# Altium PCB PCB_2.PcbDoc
Units mm, origin at the board's own origin, x right, y up, seen from the top; angles counter-clockwise.
Board outline 70 x 50 mm, 4 copper layers (Top Layer, Layer 1, Layer 2, Bottom Layer), stack 1.572 mm thick; 99 components, 81 nets, 378 pads, 29 vias.
Unrouted connection lines stored in the file: 254.
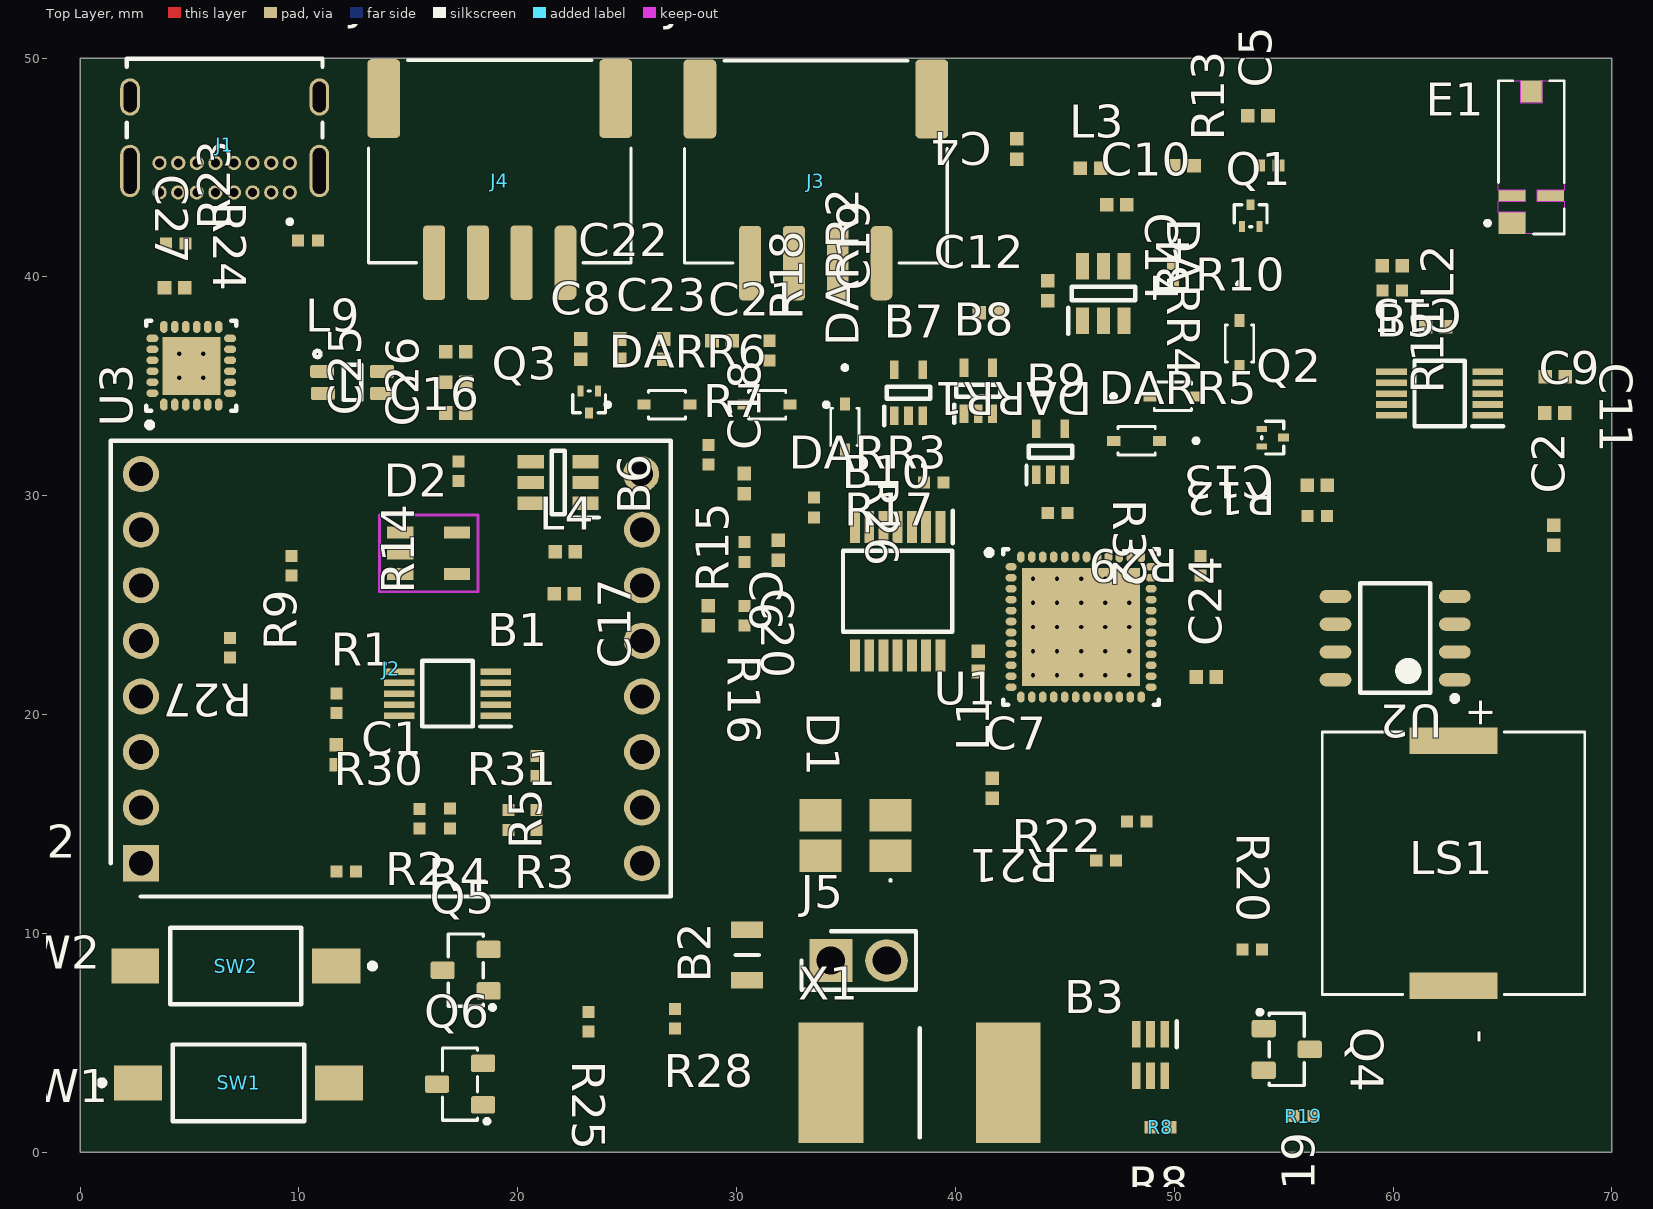
[diagram p0: Top Layer view]
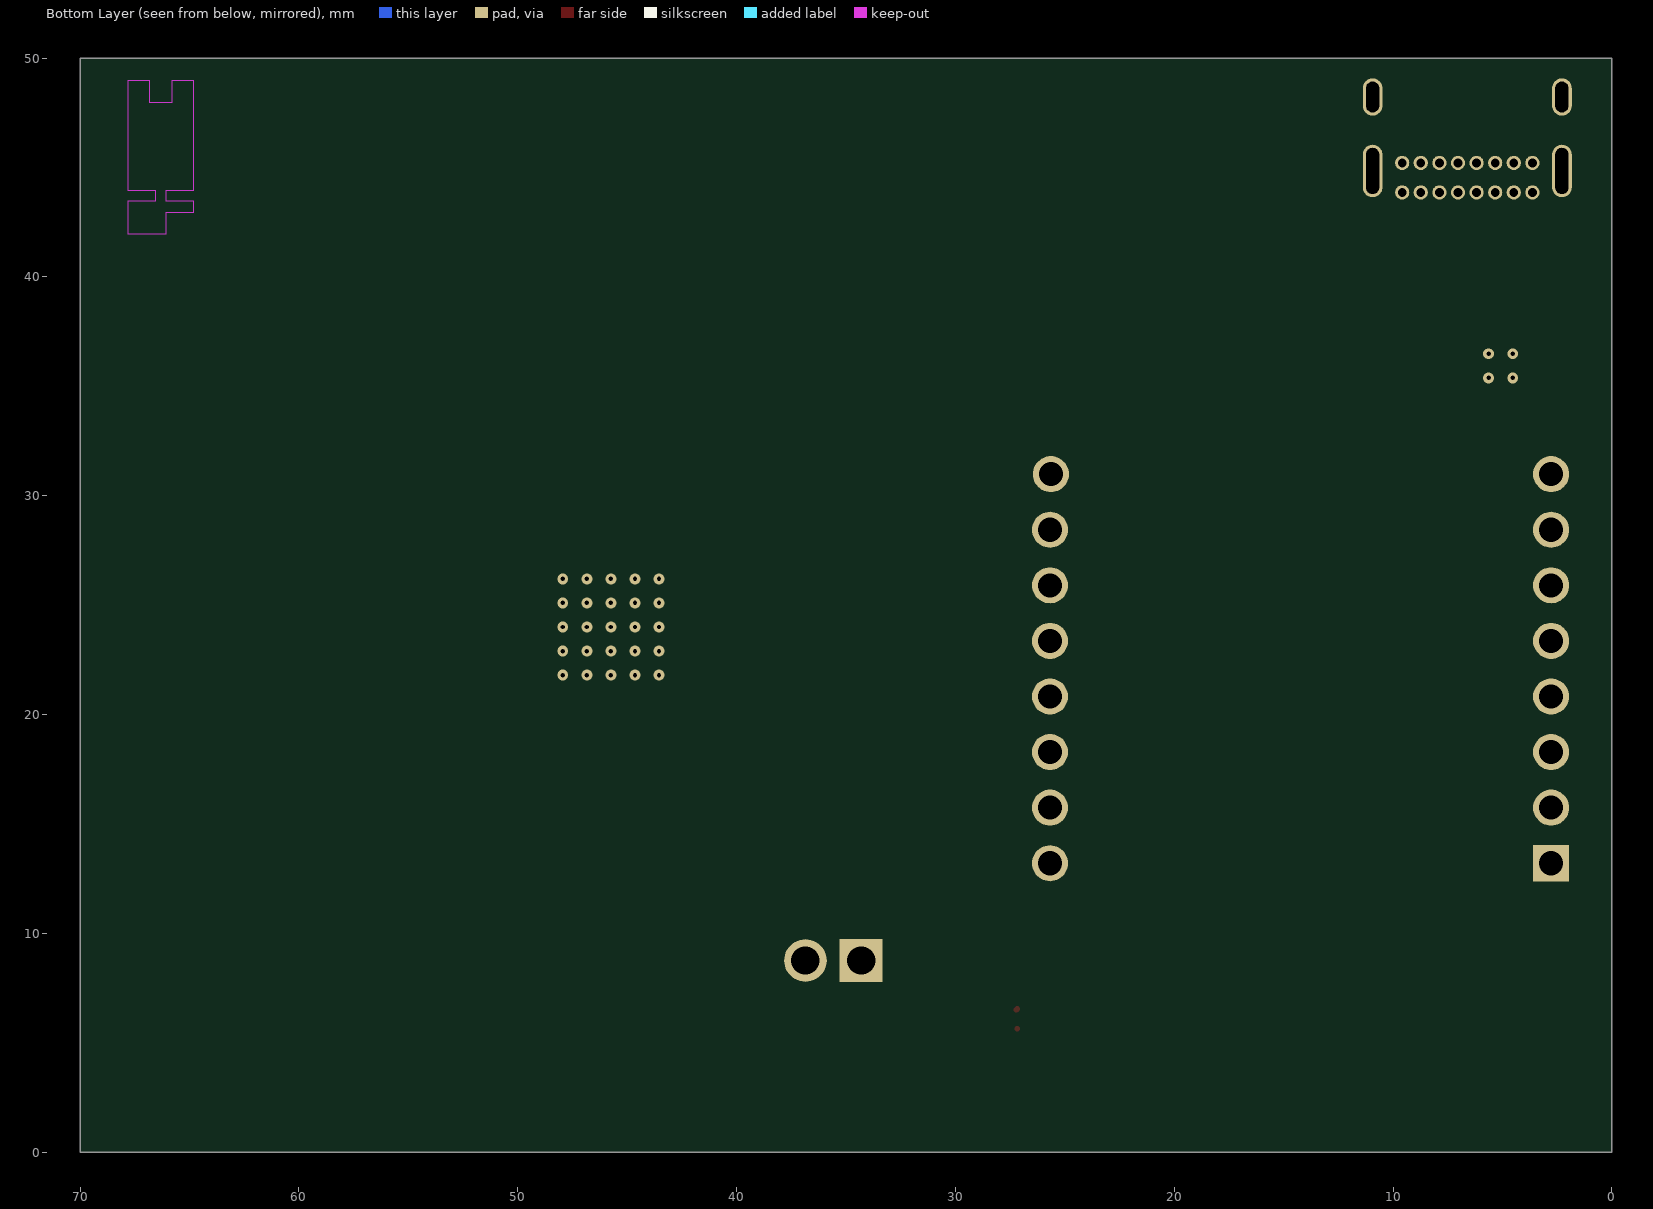
[diagram p1: Bottom Layer view, seen from below]

## Layer stack, top to bottom
Top Solder: solder mask 0.01, Solder Resist, Dk 3.5
Top Layer: signal copper 0.035
Dielectric 1: prepreg 0.1803, PP-021, Dk 4.7
Dielectric 2: prepreg 0.1803, PP-021, Dk 4.7
Layer 1: signal copper 0.035
Dielectric 3: core 0.711, Core-042, Dk 4.8
Layer 2: signal copper 0.035
Dielectric 4: prepreg 0.1803, PP-021, Dk 4.7
Dielectric 5: prepreg 0.1803, PP-021, Dk 4.7
Bottom Layer: signal copper 0.035
Bottom Solder: solder mask 0.01, Solder Resist, Dk 3.5

## Board outline
0,0 69.999,0 69.999,50 0,50

## Design rules (kind name [scope] priority, off if disabled: settings)
Clearance [All] p1: gap=0.254 ignorepadtopadclearanceinfootprint=FALSE except(0: Arc-Hole Track-Hole SMDPad-Hole THPad-Hole Via-Hole Fill-Hole Poly-Hole Region-Hole Text-Hole)
DiffPairsRouting "Schematic Differential Pairs Routing_3" [InNet('USB_D_P')] p1: maxlimit=0.127 minlimit=0.127 mostfreqgap=0.127 toplayer_minwidth=0.303 toplayer_maxwidth=0.303 toplayer_prefwidth=0.303 midlayer1_minwidth=0.109 midlayer1_maxwidth=0.109 midlayer1_prefwidth=0.109 midlayer2_minwidth=0.109 midlayer2_maxwidth=0.109 midlayer2_prefwidth=0.109 bottomlayer_minwidth=0.303 bottomlayer_maxwidth=0.303 bottomlayer_prefwidth=0.303 impedanceprofiledriven=TRUE impedanceprofileid={AF31A497-00BC-4CFA-BE3F-A0478A3B4F41} impedanceprofilevalue=90.000000 maxuncoupledlength=12.7
DiffPairsRouting "Schematic Differential Pairs Routing_2" [InNet('FILTRE_D_N')] p2: maxlimit=0.127 minlimit=0.127 mostfreqgap=0.127 toplayer_minwidth=0.303 toplayer_maxwidth=0.303 toplayer_prefwidth=0.303 midlayer1_minwidth=0.109 midlayer1_maxwidth=0.109 midlayer1_prefwidth=0.109 midlayer2_minwidth=0.109 midlayer2_maxwidth=0.109 midlayer2_prefwidth=0.109 bottomlayer_minwidth=0.303 bottomlayer_maxwidth=0.303 bottomlayer_prefwidth=0.303 impedanceprofiledriven=TRUE impedanceprofileid={AF31A497-00BC-4CFA-BE3F-A0478A3B4F41} impedanceprofilevalue=90.000000 maxuncoupledlength=12.7
DiffPairsRouting "Schematic Differential Pairs Routing_1" [InNet('USB_D_N')] p3: maxlimit=0.127 minlimit=0.127 mostfreqgap=0.127 toplayer_minwidth=0.303 toplayer_maxwidth=0.303 toplayer_prefwidth=0.303 midlayer1_minwidth=0.109 midlayer1_maxwidth=0.109 midlayer1_prefwidth=0.109 midlayer2_minwidth=0.109 midlayer2_maxwidth=0.109 midlayer2_prefwidth=0.109 bottomlayer_minwidth=0.303 bottomlayer_maxwidth=0.303 bottomlayer_prefwidth=0.303 impedanceprofiledriven=TRUE impedanceprofileid={AF31A497-00BC-4CFA-BE3F-A0478A3B4F41} impedanceprofilevalue=90.000000 maxuncoupledlength=12.7
DiffPairsRouting "Schematic Differential Pairs Routing" [InNet('FILTRE_D_P')] p4: maxlimit=0.127 minlimit=0.127 mostfreqgap=0.127 toplayer_minwidth=0.303 toplayer_maxwidth=0.303 toplayer_prefwidth=0.303 midlayer1_minwidth=0.109 midlayer1_maxwidth=0.109 midlayer1_prefwidth=0.109 midlayer2_minwidth=0.109 midlayer2_maxwidth=0.109 midlayer2_prefwidth=0.109 bottomlayer_minwidth=0.303 bottomlayer_maxwidth=0.303 bottomlayer_prefwidth=0.303 impedanceprofiledriven=TRUE impedanceprofileid={AF31A497-00BC-4CFA-BE3F-A0478A3B4F41} impedanceprofilevalue=90.000000 maxuncoupledlength=12.7
PolygonConnect [All] p1: connectstyle=Relief reliefconductorwidth=0.254 reliefentries=4 polygonreliefangle="90 Angle" airgapwidth=0.254
RoutingVias [All] p1: holewidth=0.711 width=1.27 viastyle="Through Hole" minholewidth=0.711 minwidth=1.27 maxholewidth=0.711 maxwidth=1.27
SolderMaskExpansion [All] p1: expansion=0.102 istentingtop=FALSE
SupplyNets "Schematic Supply Nets_11" [InNet('3V3')] p1: voltage=0.000
SupplyNets "Schematic Supply Nets_10" [InNet('HT')] p2: voltage=0.000
SupplyNets "Schematic Supply Nets_9" [InNet('NOT_3V3_BT')] p3: voltage=0.000
SupplyNets "Schematic Supply Nets_8" [InNet('USB')] p4: voltage=0.000
SupplyNets "Schematic Supply Nets_7" [InNet('VDDA')] p5: voltage=0.000
SupplyNets "Schematic Supply Nets_6" [InNet('NOT_3V3_USB')] p6: voltage=0.000
SupplyNets "Schematic Supply Nets_5" [InNet('3V3_Logique')] p7: voltage=0.000
SupplyNets "Schematic Supply Nets_4" [InNet('3V3_BT')] p8: voltage=0.000
SupplyNets "Schematic Supply Nets_3" [InNet('BT')] p9: voltage=0.000
SupplyNets "Schematic Supply Nets_2" [InNet('3V3_HT')] p10: voltage=0.000
SupplyNets "Schematic Supply Nets_1" [InNet('GND')] p11: voltage=0.000
SupplyNets "Schematic Supply Nets" [InNet('3V3_USB')] p12: voltage=0.000
Width Antenne [InNet('NetC5_2')] p1: maxlimit=0.624 minlimit=0.254 preferedwidth=0.624 impedanceprofiledriven=TRUE impedanceprofileid={634E063D-215B-4283-ACFF-58841ED45AF4} impedanceprofilevalue=50.000000 minimp=50.000000 maximp=50.000000 favimp=50.000000 checkconnectedcopper=TRUE // Schematic Width Constraint
Width [All] p2: maxlimit=0.624 minlimit=0.352 preferedwidth=0.624 toplayer_minwidth=0.624 midlayer1_maxwidth=0.352 midlayer1_prefwidth=0.352 midlayer2_maxwidth=0.352 midlayer2_prefwidth=0.352 bottomlayer_minwidth=0.624 minimp=50.000000 maximp=50.000000 favimp=50.000000
29 further rules are at their usual default settings.

## Classes and differential pairs
component class USB: C25 C26 C27 D2 J1 L1 L9 Q5 Q6 R23 R24 R25 R26 R27 R28 U3
component class Logique_Prio_Alim: B7 B8 B9 B10 DARR4 DARR5 DARR6 Q1 Q2 Q3
component class IHM: C21 D1 LS1 Q4 R18 R19 R20 R21 R22 SW1 SW2
component class I2C: B1 C1 C2 J2 J3 J4 J5 R1 R2 R3 R4 R5 R29 R30 R31 X1
component class ESP32_SRAM: C22 C23 C24 R32 U1 U2
component class Converti_Alim: B4 B5 B6 C9 C10 C11 C12 C13 C14 C15 C16 C17 C18 C19 C20 DARR1 DARR2 DARR3 L2 L3 L4 R10 R11 R12 R13 R14 R15 R16 R17
component class Capteurs_et_Antenne: B2 B3 C4 C5 C6 C7 C8 E1 R7 R8 R9
differential pair USB_D: +USB_D_P -USB_D_N
differential pair FILTRE_D: +FILTRE_D_P -FILTRE_D_N

## Components (designator, comment, footprint, x,y, rotation, side; value= is the part's Value field where it differs from the comment)
B1 "INA237AIDGST" SOP50P490X110-10N 16.787,20.955 r180 top
B2 "NB12K00103JBB" RESC2212X50N 30.48,9.017 r90 top
B3 "TMP126DCKR" SOT65P210X110-6N 48.918,4.445 r270 top
B4 "LMR50410Y3FQDBVRQ1" SOT95P280X145-6N 46.759,39.243 r90 top
B5 "TPS62056DGSG4" SOP50P490X110-10N 62.126,34.671 r180 top
B6 "LMR50410Y3FQDBVRQ1" SOT95P280X145-6N 21.847,30.607 r180 top
B7 "MC74VHC1GT08DFT2G" SOT65P210X110-5N 37.854,34.705 r90 top
B8 "MC74VHC1GT08DFT2G" SOT65P210X110-5N 41.044,34.798 r90 top
B9 "MC74VHC1GT08DFT2G" SOT65P210X110-5N 44.346,32.004 r90 top
B10 "74VHC05FT" SOP65P640X120-14N 37.361,25.637 r270 top
C1 "100nF" CAPC1005X06N 11.707,18.161 r270 top
C2 "100nF" CAPC1005X06N 67.333,28.194 r90 top
C4 "0.6pF" CAPC1005X06N 42.799,45.847 r270 top
C5 "0.9pF" CAPC1005X06N 53.823,47.371 r0 top
C6 "10nF" CAPC1005X06N 28.702,24.511 r270 top
C7 "1pF" CAPC1005X06N 41.679,16.637 r90 top
C8 "0.1µF" CAPC1005X06N 22.883,36.703 r90 top
C9 "10µF" CAPC1005X06N 67.381,33.782 r0 top
C10 "2.2µF" CAPC1005X06N 47.371,43.307 r180 top
C11 "22µF" CAPC1005X06N 67.412,35.433 r0 top
C12 "0.1µF" CAPC1005X06N 44.219,39.37 r90 top
C13 "0.01F" CAPC1005X06N 56.538,30.48 r180 top
C14 "0.01F" CAPC1005X06N 50.442,45.085 r0 top
C15 "10µF" CAPC1005X06N 59.967,40.513 r0 top
C16 "2.2µF" CAPC1005X06N 17.168,36.576 r180 top
C17 "0.1µF" CAPC1005X06N 22.121,25.527 r180 top
C18 "0.01F" CAPC1005X06N 30.353,30.559 r90 top
C19 "10µF" CAPC1005X06N 41.552,38.354 r0 top
C20 "10µF" CAPC1005X06N 31.9,27.511 r270 top
C21 "1µF" CAPC1005X06N 29.337,37.084 r180 top
C22 "10µF" CAPC1005X06N 24.661,36.703 r90 top
C23 "100nF" CAPC1005X06N 26.67,36.703 r90 top
C24 "100nF" CAPC1005X06N 51.458,21.717 r0 top
C25 "100nF" CAPC1005X06N 17.168,35.179 r180 top
C26 "22µF" CAPC1005X06N 17.168,33.782 r180 top
C27 "4.7µF" CAPC1005X06N 4.318,39.497 r180 top
D1 "598-8610-207F" 5988610207F 35.433,14.478 r180 top
D2 "824011" 824011 15.928,27.366 r270 top
DARR1 "SD103AWS-7-F" SD103AWS-7-F 49.934,34.544 r0 top
DARR2 "SD103AWS-7-F" SD103AWS-7-F 34.948,33.147 r270 top
DARR3 "SD103AWS-7-F" SD103AWS-7-F 31.392,34.163 r180 top
DARR4 "SD103AWS-7-F" SD103AWS-7-F 52.982,36.957 r270 top
DARR5 "SD103AWS-7-F" SD103AWS-7-F 48.283,32.512 r180 top
DARR6 "SD103AWS-7-F" SD103AWS-7-F 26.82,34.163 r0 top
E1 "NN03-320" XCVR_NN03-320 66.317,45.466 r270 top
J1 "Use" USB4085-GF-A 6.609,48.222 r180 top
J2 "825433-8" Connect-Mikrobus 2.777,13.208 r90 top locked
J3 "114020164" 114020164 33.621,44.433 r180 top
J4 "114020164" 114020164 19.177,44.45 r180 top
J5 "61300211121" 61300211121 34.313,8.763 r0 top
L1 "12nH" LQPC1005X06N 38.25,25.225 r90 top
L2 "10µH" LQPC1005X06N 64.745,40.513 r0 top
L3 "3.3µH" LQPC1005X06N 48.966,47.752 r0 top
L4 "3.3µH" LQPC1005X06N 24.963,30.226 r0 top
L9 "Filtre en mode commun" 744232090 12.446,35.179 r0 top
LS1 "PKLCS1212E40A1-R1" SPKR_PKLCS1212E40A1-R1 62.761,13.208 r270 top
Q1 "SI3139K-TP" SI3139K-TP 53.49,42.799 r0 top
Q2 "SI3139K-TP" SI3139K-TP 54.498,32.658 r270 top
Q3 "SI3139K-TP" SI3139K-TP 23.264,34.29 r180 top
Q4 "SS8050-G" SS8050-G 55.141,4.699 r270 top
Q5 "SS8050-G" SS8050-G 17.619,8.321 r90 top
Q6 "SS8050-G" SS8050-G 17.365,3.114 r90 top
R1 "10Ω" RESC1005X06N 11.707,20.516 r90 top
R2 "10Ω" RESC1005X06N 12.157,12.827 r0 top
R3 "4.7kΩ" RESC1005X06N 20.851,15.182 r270 top
R4 "4.7kΩ" RESC1005X06N 16.914,15.251 r270 top
R5 "10kΩ" RESC1005X06N 20.851,17.653 r270 top
R7 "10kΩ" RESC1005X06N 28.725,31.877 r270 top
R8 "10kΩ" RESC1005X06N 49.368,1.143 r0 top
R9 "10kΩ" RESC1005X06N 9.652,26.797 r90 top
R10 "51kΩ" RESC1005X06N 49.934,40.132 r270 top
R11 "22.1kΩ" RESC1005X06N 59.967,39.37 r180 top
R12 "1kΩ" RESC1005X06N 56.538,29.083 r180 top
R13 "1kΩ" RESC1005X06N 54.321,45.085 r180 top
R14 "100k" RESC1005X06N 17.295,31.115 r90 top
R15 "51kΩ" RESC1005X06N 30.353,27.432 r270 top
R16 "22.1kΩ" RESC1005X06N 30.353,24.511 r90 top
R17 "1kΩ" RESC1005X06N 33.528,29.464 r90 top
R18 "10kΩ" RESC1005X06N 31.496,36.634 r270 top
R19 "1kΩ" RESC1005X06N 55.903,1.651 r180 top
R20 "1kΩ" RESC1005X06N 53.559,9.271 r0 top
R21 "330Ω" RESC1005X06N 46.886,13.335 r180 top
R22 "330Ω" RESC1005X06N 48.283,15.113 r180 top
R23 "5.1kΩ" RESC1005X06N 10.414,41.656 r180 top
R24 "5.1kΩ" RESC1005X06N 4.376,41.529 r0 top
R25 "12kΩ" RESC1005X06N 23.241,5.969 r270 top
R26 "470Ω" RESC1005X06N 39.012,30.607 r180 top
R27 "470Ω" RESC1005X06N 6.858,23.056 r90 top
R28 "12kΩ" RESC1005X06N 27.178,6.096 r90 top
R29 "100kΩ" RESC1005X06N 51.204,26.797 r90 top
R30 "2kΩ" RESC1005X06N 15.517,15.24 r270 top
R31 "2kΩ" RESC1005X06N 19.581,15.182 r270 top
R32 "0Ω" RESC1005X06N 44.669,29.21 r0 top
SW1 "FSMSM" TECO-FSMSM-2_V 7.239,3.175 r0 top
SW2 "FSMSM" TECO-FSMSM-2_V 7.112,8.509 r180 top
U1 "ESP32-PICO-D4" PQFN50P700X700X104_HS-49N 45.743,24.003 r0 top
U2 "IS66WVS1M8BLL-104NLI" SOIC127P600X175-8N 60.094,23.495 r180 top
U3 "CP2104-F03-GM" PQFN50P400X400X80_HS-25N 5.08,35.941 r90 top
X1 "PSR400ITQFF0L50" RESC10052X200N 38.363,3.175 r0 top

## Footprints (in the part's own frame and the unit in brackets; to place one, negate y for a bottom-side part, rotate by r counter-clockwise, add the part's x,y. Pads: shape width x height; smd on the part's side, far side on the other; paste and mask are expansions set on the pad)
824011 [mil] "Suppresseurs ESD / diodes TVS WE-TVS High Speed 5uA 5VDC 2+1"
  rect 21.65x47.24 smd: 1(-37.4,-51.18) 2(0,-51.18) 3(37.4,-51.18) 4(37.4,51.18) 5(-37.5,51)
  Top Layer keep-out lines w5: 68.9,-88.58 -68.9,-88.58 -68.9,88.58 68.9,88.58 68.9,-88.58
  body extent -57,-55 57,55, height 57
114020164 [mm]
  rrect50% 1x3.4 smd: 1(-3,3.8)
  rrect30% 1x3.4 smd: 2(-1,3.8) 3(1,3.8) 4(3,3.8)
  rrect26% 1.5x3.6 smd: MP1(-5.3,-3.7) MP2(5.3,-3.7)
  silkscreen extent -6,-5.45 6,3.8, body extent -6.1,-5.59 5.9,4.59, height 5.2
744232090 [mm]
  rrect50% 1.1x0.6 smd: 1(-1.4,0.5)
  rrect33% 1.1x0.6 smd: 2(1.35,0.5) 3(1.35,-0.5) 4(-1.35,-0.5)
  silkscreen extent -1.74,-0.8 0.4,1.44, body extent -1.6,-0.8 1.6,0.8, height 1.8
5988610207F [mm]
  rect 1.9x1.5 smd: 1(-1.6,0.925) 2(1.6,0.925) 3(-1.6,-0.925) 4(1.6,-0.925)
  silkscreen extent -1.65,2 -1.55,2.1, body extent -1.6,-1.35 1.6,1.35, height 0.9
61300211121 [mm] "Embases et logements de câbles WR-PHD 2.54mm 2Pin T HT Header"
  rect 1.95x1.95 / inner round 1.95 / far side rect 1.95x1.95 hole 1.3: 1(0,0)
  round 1.95 hole 1.3: 2(2.54,0)
  silkscreen extent -1.35,-1.35 3.89,1.35
CAPC1005X06N [mm] "Chip Capacitor, 2-Leads, Body 1,00x0,50mm, IPC Medium Density"
  rect 0.62x0.62 smd: 1(-0.46,0) 2(0.46,0)
  body extent -0.53,-0.28 0.53,0.28, height 0.55
Connect-Mikrobus [mm]
  rect 1.65x1.65 / inner round 1.65 / far side rect 1.65x1.65 hole 1.1: 1(0,0)
  round 1.65 hole 1.1: 2(2.54,0) 3(5.08,0) 4(7.62,0) 5(10.16,0) 6(12.7,0) 7(15.24,0) 8(17.78,0) 9(17.78,-22.86) 10(15.24,-22.9) 11(12.7,-22.9) 12(10.16,-22.9) 13(7.62,-22.9) 14(5.08,-22.9) 15(2.54,-22.9) 16(0,-22.9)
  silkscreen extent -1.52,-24.22 19.3,1.37, body extent -1.37,-24.18 19.14,1.28, height 6.7
LQPC1005X06N [mm]
  rect 0.62x0.62 smd: 1(-3.254,-2.794) 2(-2.334,-2.794)
  body extent -3.32,-3.07 -2.27,-2.52, height 0.55
PQFN50P400X400X80_HS-25N [mm] "PQFN, 24-Leads, Body 4,00x4,00mm, Pitch 0,50mm, Thermal Pad 2,65x2,65mm, IPC Medium Density"
  oval 0.55x0.35 smd: 1(-1.775,1.25) 2(-1.775,0.75) 3(-1.775,0.25) 4(-1.775,-0.25) 5(-1.775,-0.75) 6(-1.775,-1.25) 13(1.775,-1.25) 14(1.775,-0.75) 15(1.775,-0.25) 16(1.775,0.25) 17(1.775,0.75) 18(1.775,1.25)
  oval 0.35x0.55 smd: 7(-1.25,-1.775) 8(-0.75,-1.775) 9(-0.25,-1.775) 10(0.25,-1.775) 11(0.75,-1.775) 12(1.25,-1.775) 19(1.25,1.775) 20(0.75,1.775) 21(0.25,1.775) 22(-0.25,1.775) 23(-0.75,1.775) 24(-1.25,1.775)
  rect 2.65x2.65 smd: 25(0,0)
  silkscreen extent -2.82,-2.05 2.05,2.05, body extent -2.05,-2.05 2.05,2.05, height 0.8
PQFN50P700X700X104_HS-49N [mm] "PQFN, 48-Leads, Body 7,00x7,00mm, Pitch 0,50mm, Thermal Pad 5,40x5,40mm, IPC Medium Density"
  oval 0.5x0.35 smd: 1(-3.2,2.75) 2(-3.2,2.25) 3(-3.2,1.75) 4(-3.2,1.25) 5(-3.2,0.75) 6(-3.2,0.25) 7(-3.2,-0.25) 8(-3.2,-0.75) 9(-3.2,-1.25) 10(-3.2,-1.75) 11(-3.2,-2.25) 12(-3.2,-2.75) 25(3.2,-2.75) 26(3.2,-2.25) 27(3.2,-1.75) 28(3.2,-1.25) 29(3.2,-0.75) 30(3.2,-0.25) 31(3.2,0.25) 32(3.2,0.75) 33(3.2,1.25) 34(3.2,1.75) 35(3.2,2.25) 36(3.2,2.75)
  oval 0.35x0.5 smd: 13(-2.75,-3.2) 14(-2.25,-3.2) 15(-1.75,-3.2) 16(-1.25,-3.2) 17(-0.75,-3.2) 18(-0.25,-3.2) 19(0.25,-3.2) 20(0.75,-3.2) 21(1.25,-3.2) 22(1.75,-3.2) 23(2.25,-3.2) 24(2.75,-3.2) 37(2.75,3.2) 38(2.25,3.2) 39(1.75,3.2) 40(1.25,3.2) 41(0.75,3.2) 42(0.25,3.2) 43(-0.25,3.2) 44(-0.75,3.2) 45(-1.25,3.2) 46(-1.75,3.2) 47(-2.25,3.2) 48(-2.75,3.2)
  rect 5.4x5.4 smd: 49(0,0)
  silkscreen extent -4.32,-3.55 3.55,3.55, body extent -3.55,-3.55 3.55,3.55, height 1.04
RESC1005X06N [mm] "Chip Resistor, 2-Leads, Body 1,00x0,50mm, IPC Medium Density"
  rect 0.55x0.55 smd: 1(-0.45,0) 2(0.45,0)
  body extent -0.53,-0.28 0.53,0.28, height 0.55
RESC2212X50N [mm]
  rect 0.75x1.45 smd: 1(-1.15,0) 2(1.15,0)
  silkscreen extent 0,-0.53 0,0.53, body extent -1.07,-0.63 1.07,0.63, height 0.5
RESC10052X200N [mm]
  rect 2.95x5.5 smd: 1(-4.05,0) 2(4.05,0)
  silkscreen extent 0,-2.5 0,2.5, body extent -5,-2.6 5,2.6, height 2
SD103AWS-7-F [mm]
  rect 0.6x0.46 smd: 1(-1.05,0) 2(1.05,0)
  silkscreen extent -2.81,-0.65 0.85,0.65, body extent -1.25,-0.65 1.25,0.65, height 1.2
SI3139K-TP [mm] "MOSFET P-Channel MOSFET"
  rect 0.28x0.5 smd paste+0 mask+0.075: 1(-0.4,-0.5) 2(0.4,-0.5)
  rect 0.36x0.5 smd paste+0 mask+0.075: 3(0,0.5)
  silkscreen extent -0.75,-0.5 0.75,0.5, body extent -0.6,-0.6 0.6,0.6, height 0.55
SOIC127P600X175-8N [mm] "SOIC, 8-Leads, Body 4,90x3,90mm, Pitch 1,27mm, IPC Medium Density"
  oval 1.45x0.6 smd: 1(-2.725,1.905) 2(-2.725,0.635) 3(-2.725,-0.635) 4(-2.725,-1.905) 5(2.725,-1.905) 6(2.725,-0.635) 7(2.725,0.635) 8(2.725,1.905)
  silkscreen extent -2.85,-2.5 1.6,2.88, body extent -3,-2.5 3,2.5, height 1.75
SOP50P490X110-10N [mm]
  rect 1.4x0.3 smd: 1(-2.2,1) 2(-2.2,0.5) 3(-2.2,0) 4(-2.2,-0.5) 5(-2.2,-1) 6(2.2,-1) 7(2.2,-0.5) 8(2.2,0) 9(2.2,0.5) 10(2.2,1)
  silkscreen extent -2.9,-1.5 1.15,1.5, body extent -2.46,-1.5 2.46,1.5, height 1.06
SOP65P640X120-14N [mm]
  rect 1.475x0.45 smd: 1(-2.938,1.95) 2(-2.938,1.3) 3(-2.938,0.65) 4(-2.938,0) 5(-2.938,-0.65) 6(-2.938,-1.3) 7(-2.938,-1.95) 8(2.938,-1.95) 9(2.938,-1.3) 10(2.938,-0.65) 11(2.938,0) 12(2.938,0.65) 13(2.938,1.3) 14(2.938,1.95)
  silkscreen extent -3.67,-2.5 1.85,2.52, body extent -3.1,-2.75 3.3,2.75, height 1.1
SOT65P210X110-5N [mm]
  rect 0.85x0.4 smd: 1(-1.05,0.65) 2(-1.05,0) 3(-1.05,-0.65) 4(1.05,-0.65) 5(1.05,0.65)
  silkscreen extent -1.48,-1 0.28,1.1, body extent -0.95,-1 1.15,1, height 1.1
SOT65P210X110-6N [mm]
  rect 1.2x0.4 smd: 1(-0.95,0.65) 2(-0.95,0) 3(-0.95,-0.65) 4(0.95,-0.65) 5(0.95,0) 6(0.95,0.65)
  silkscreen extent -1.55,1.2 -0.35,1.2, body extent -1.05,-1 1.05,1, height 1
SOT95P280X145-6N [mm]
  rect 1.2x0.6 smd: 1(-1.25,0.95) 2(-1.25,0) 3(-1.25,-0.95) 4(1.25,-0.95) 5(1.25,0) 6(1.25,0.95)
  silkscreen extent -1.85,-1.45 0.3,1.6, body extent -1.4,-1.45 1.4,1.45, height 1.2
SPKR_PKLCS1212E40A1-R1 [mm]
  rect 1.2x4 smd: N(5.6,0) P(-5.6,0)
  silkscreen extent -6,-6 6,6, body extent -6,-6 6,6, height 3
SS8050-G [mm]
  rrect25% 0.8x1.1 smd paste+0 mask+0.075: 1(-0.95,-1.05) 2(0.95,-1.05) 3(0,1.05)
  silkscreen extent -1.77,-1.3 1.65,0.8, body extent -1.5,-1.3 1.5,1.3, height 1.1
TECO-FSMSM-2_V [mm] "SMD, 2-Leads, Body 6x3.5mm, Pitch 9.19mm"
  rect 2.2x1.6 smd: 1(-4.595,0)
  rect 2.18x1.6 smd: 2(4.595,0)
  silkscreen extent -6.37,-1.75 3,1.75, body extent -4.98,-1.75 4.98,1.75, height 4.4
USB4085-GF-A [mm]
  round 0.65 hole 0.4: A1(-2.975,4.36) A4(-2.125,4.36) A5(-1.275,4.36) A6(-0.425,4.36) A7(0.425,4.36) A8(1.275,4.36) A9(2.125,4.36) A12(2.975,4.36) B1(2.975,3.01) B4(2.125,3.01) B5(1.275,3.01) B6(0.425,3.01) B7(-0.425,3.01) B8(-1.275,3.01) B9(-2.125,3.01) B12(-2.975,3.01)
  oval 0.9x1.7 hole 0.6 slot 1.4 at 90 deg: S1(-4.325,0) S2(4.325,0)
  oval 0.9x2.4 hole 0.6 slot 2.1 at 90 deg: S3(-4.325,3.38) S4(4.325,3.38)
  silkscreen extent -4.47,-1.74 4.47,5.8, body extent -4.47,-4.25 4.47,4.92, height 3.46
XCVR_NN03-320 [mm]
  rect 1x1 smd: 1(-3,0)
  rect 0.5x1.25 smd: 2(1.75,-0.875) 4(1.75,0.875)
  rect 1x1.25 smd: 3(3,-0.875)
  Keep-Out Layer region: 3.5,-0.25 2.5,-0.25 2.5,-1.5 2,-1.5 2,-0.25 1.5,-0.25 1.5,-1.5 -3.5,-1.5 -3.5,-0.5 -2.5,-0.5 -2.5,0.5 -3.5,0.5 -3.5,1.5 1.5,1.5 1.5,0.25 2,0.25 2,1.5 3.5,1.5
  silkscreen extent -3.5,-2.1 3.5,1.5, body extent -3.5,-1.5 3.5,1.5, height 2.02

## Part data
B1: "Current Sense Amplifiers 85-V, 16-bit, I2C output current/voltage/power monitor with alert 10-VSSOP -40 to 125", Manufacturer_Name="Texas Instruments", Mouser Part Number=595-INA237AIDGST, Manufacturer_Part_Number=INA237AIDGST
B2: "CTN Capteur - NTC SMD Thermistor, NB12K, 10K, 5% AVX 10k 0805 Protection NTC Thermistor, 5s, 2 x 1.25 x 1.3mm", Manufacturer_Name="Kyocera AVX", Mouser Part Number=581-NB12K00103JBB, Arrow Part Number=NB12K00103JBB, Arrow Price/Stock=https://www.arrow.com/en/products/nb12k00103jbb/avx, Datasheet Link=https://datasheet.datasheetarchive.com/originals/distributors/Datasheets-DGA6/551314.pdf, Geometry.Height=0.5mm, Manufacturer_Part_Number=NB12K00103JBB, Mouser Price/Stock=https://www.mouser.co.uk/ProductDetail/AVX/NB12K00103JBB/?qs=4%252B6%252BTdINQeDPvI%252BQUQjJ3Q%3D%3D
B3: "Board Mount Temperature Sensors +/-0.25 C SPI temperature sensor with 175 C operation, CRC and slew-rate alert", Manufacturer_Name="Texas Instruments", Mouser Part Number=595-TMP126DCKR, Manufacturer_Part_Number=TMP126DCKR
B4 B6: "Régulateurs de tension de commutation Automotive qualified SIMPLE SWITCHER 4-V to 36-V, 1-A synchronous step-down converter 6-SOT-23 -40 to 150", Manufacturer_Name="Texas Instruments", Mouser Part Number=595-R50410Y3FQDBVRQ1, Manufacturer_Part_Number=LMR50410Y3FQDBVRQ1
B5: "TEXAS INSTRUMENTS - TPS62056DGSG4 - Synchronous Buck (Step Down) Switching Regulator, Fixed, 2.7V-10Vin, 3.3V/0.8A out, 850kHz, VSSOP-10", Manufacturer_Name="Texas Instruments", Mouser Part Number=595-TPS62056DGSG4, Manufacturer_Part_Number=TPS62056DGSG4
B7 B8 B9: "Single 2-Input AND Gate, TTL Level", Manufacturer_Name=onsemi, Manufacturer_Part_Number=MC74VHC1GT08DFT2G
B10: "Logic Gates CMOS LOGIC IC INVERTER", Manufacturer_Name=Toshiba, Mouser Part Number=757-74VHC05FT, Manufacturer_Part_Number=74VHC05FT
C1 C2 C4 C5 C6 C7 C8 C9 C10 C11 C12 C13 C14 C15 C16 C17 C18 C19 C20 C21 C22 C23 C24 C25 C26 C27: library part Capacitor
D1: "Standard LEDs - SMD Red/Green WC 80/50mcd 645/570nm", Manufacturer_Name=Dialight, Mouser Part Number=645-598-8610-207F, Arrow Part Number=598-8610-207F, Arrow Price/Stock=https://www.arrow.com/en/products/598-8610-207f/dialight?region=nac, Datasheet Link=https://media.digikey.com/pdf/Data%20Sheets/Dialight%20PDFs/598%20Series%201210%20Pkg%20Bi-Color.pdf, Geometry.Height=0.8mm, Manufacturer_Part_Number=598-8610-207F, Mouser Price/Stock=https://www.mouser.co.uk/ProductDetail/Dialight/598-8610-207F?qs=7JStj%2FjQ2SFuCjosqwklHQ%3D%3D
D2: "TVS Diode Array WE-TVS, High Speed Series  - Low capazity - No leakage current - Low clamping voltage - high ESD voltage protection  -- USB 1.0 - 2.0"
DARR1 DARR2 DARR3 DARR4 DARR5 DARR6: "Diode Array 3 Independent Schottky 40V 175mA Surface Mount 6-TSSOP, SC-88, SOT-363"
E1: "Dual port antenna booster for GNSS, Bluetooth, 5G and UWB (1561 - 1606MHz, 2400 - 2500MHz, 3400 - 3800MHz, 3100 - 4800MHz and 6000 - 10600 MHz), signal booster", Manufacturer_Name=Ignion, Mouser Part Number=128-NN03-320, Manufacturer_Part_Number=NN03-320
J1: library part USB4085-GF-A, "Connecteurs USB USB Type C, 2.0, Rec, TH , G/F, RA , Top Mnt, T & R"
J2: library part Connect-Mikrobus, "Headers & Wire Housings 8P double for connection mikrobus", Manufacturer_Name="TE Connectivity", Mouser Part Number=571-825433-8, Manufacturer_Part_Number=825433-8
J3 J4: "Seeed Studio Accessories Grove Female Header - SMD-4P-2.0mm-90D-20Pcs", Manufacturer_Name="Seeed Studio", Mouser Part Number=713-114020164, Manufacturer_Part_Number=114020164
J5: "WURTH ELEKTRONIK - 61300211121 - HEADER, 2.54MM, PIN, THT, VERTICAL, 2WAY"
L1: library part 74477710, "WE-PD SMT Power Inductor, size 7345, 10uH, 2A, 49mOhm", Case/Size Code=7345, DC Resistance=45mOhm, DC Resistance Max=49mOhm, Inductance=10uH, Manufacturer="Wurth Elektronik", Operating Temperature Max=125°C, Operating Temperature Min=-40°C, Rated Current=2A, Saturation Current=2.6A, Self Resonant Frequency=26MHz, Category="Power Inductors", ComponentLink1Description="Website Link", ComponentLink1URL=https://www.we-online.com/redexpert/article/74477710?ad, ComponentLink2Description="Datasheet Link", ComponentLink2URL=https://www.we-online.com/redexpert/spec/74477710?ad, Height=4.5mm, Length=7.3mm, Manufacturer Part Number=74477710, Match Code=WE-PD, Mount="Surface Mount", Packaging="Tape and Reel", Type=Standard, Width=7.3mm
L2 L3 L4: library part Bobine
L9: library part 744232090, "Bobines / filtres en mode commun WE-CNSW 1206 370mA 90Ohm 100MHz AECQ200"
LS1: "Buzzers Transducer, Externally Driven Piezo 1.5V 2kHz 70dB @ 1.5V, 10cm Surface Mount Solder Pads", Package=None, Availability=Unavailable, MF="Murata Electronics", MP=PKLCS1212E40A1-R1, Price=None
Q1 Q2 Q3: "MOSFET P-Channel MOSFET"
Q4 Q5 Q6: "Bipolar Transistors - BJT NPN TRANSISTOR 1.5A 40V"
R1 R2 R3 R4 R5 R7 R8 R9 R10 R11 R12 R13 R14 R15 R16 R17 R18 R19 R20 R21 R22 R23 R24 R25 R26 R27 R28 R29 R30 R31 R32: library part Resistor
SW1 SW2: library part CMP-2000-07511-1, "FSMSM Push Button Switch, 50 mA, -35 to 85 degC, 2-Pin SMD, RoHS, Bulk", Case\/Package=SMD/SMT, Contact Current Rating=50mA, Contact Resistance=100mOhm, Manufacturer="TE Connectivity", Max Operating Temperature=85degC, Max Voltage Rating (DC)=12V, Min Operating Temperature=-35degC, Operating Force=180gf, Package Description="2-Pin Surface Mount Device, Body 6 x 3.5 mm, Pitch 9.19 mm", Package Quantity=1000, Voltage Rating (DC)=24V, Actuator Length=1.07mm, Actuator Material=Polyamide, Contact Material=Brass, Contact Plating=Silver, Current Rating=50mA, Datasheet URL=http://www.te.com/commerce/DocumentDelivery/DDEController?Action=showdoc&DocId=Customer+Drawing%7F1437566-3%7FC2%7Fpdf%7FEnglish%7FENG_CD_1437566-3_C2_1437566_3_1_c.dwg.pdf%7F1437566-3, Datasheet Version="Rev. C2, 08/2014", Electrical Life=20000Cycles, ELV=Compliant, Illumination Type=Illuminated, Lead Free=LeadFree, Manufacturer URL=http://www.te.com/, Mechanical Life=20000Cycles, Mount=SurfaceMount, Mounting Technology=SurfaceMount, Orientation=Straight, Package Reference=FSMSM, Packaging=LoosePiece, REACH SVHC=Unknown, RoHSCompliant=true, Switch Travel=0.25mm, Termination=GullWing, Throw Configuration=SPST
U1: library part ESP32, "Système RF sur puce - SoC SIP module ESP32 with 4MByte Flash, Dual Core MCU, Wi-Fi & Bluetooth Combo, LGA48-pin, 7*7mm", Manufacturer 1="Espressif Systems", Supplier Part Number 1=1904-1029-1-ND, Manufacturer Part Number 1=ESP32-PICO-D4, Supplier 1=Digi-Key
U2: library part SRAM, "SRAM 8Mb, SerialRAM, 2.7V-3.6V, 104MHz, 8 pin SOIC 150 mil, RoHS", Manufacturer 1=ISSI, Supplier Part Number 1=706-IS66WVS1M8BLL-104NLI-ND, Manufactuer Part Number 1=IS66WVS1M8BLL-104NLI, Supplier 1=Digi-Key
U3: library part USBBridge, "USB Bridge, USB to UART USB 2.0 UART Interface 24-QFN (4x4)", Manufacturer 1="Silicon Labs", Manufacturer Part Number 1=CP2104-F03-GM, Supplier 1="Arrow Electronics", Supplier Part Number 1=CP2104-F03-GM
X1: "ROHM - PSR400ITQFF0L50 - SMD Current Sense Resistor, 500 ohm, PSR Series, 3921 [1052 Metric], 4 W, +/- 1%, Metal Strip", Manufacturer_Name="ROHM Semiconductor", Mouser Part Number=755-PSR400ITQFF0L50, Datasheet Link=https://componentsearchengine.com/Datasheets/2/PSR400ITQFF0L50.pdf, Geometry.Height=2mm, Manufacturer_Part_Number=PSR400ITQFF0L50, Mouser Price/Stock=https://www.mouser.co.uk/ProductDetail/ROHM-Semiconductor/PSR400ITQFF0L50?qs=493kPxzlxfLaT1w5Mo%252BtHg%3D%3D

## Via types
v1: diameter 0.5, hole 0.2, Top Layer to Bottom Layer, 29 vias

## Nets (pads, with @x,y where several pads share a name; then routed paths per layer and width w, separated by ;. In a path a pad name is that pad's centre, name@x,y a point inside that pad or via, vN(x,y) a via of type N, cw(c..) or ccw(c..) an arc to the next point about the centre after c; other vN are vias at no path point)
3V3: B1.6 B3.6 C2.1 C8.1 C22.1 C23.1 J2.7 J3.3 J4.3 LS1.P Q1.2 Q2.2 Q3.2 R3.1 R4.1 R5.2 R7.1 R8.2 R18.2 R19.2 R29.2 R30.1 R31.1 R32.1 U1.1 U1.3 U1.4 U1.19 U1.37 U1.46 U3.5 U3.6
3V3_BT: B9.2 B10.3 C13.2 DARR2.2 R12.2
3V3_HT: C14.2 DARR1.2 R13.2
3V3_Logique: B7.5 B8.5 B9.5 C19.1 DARR1.1 DARR2.1 DARR3.1
3V3_USB: B10.5 C18.2 DARR3.2 DARR6.2 R17.2
BT: B5.1 B5.8 C9.1 Q2.3
FILTRE_D_N: D2.4 J1.A7 J1.B7 L9.3
FILTRE_D_P: D2.3 J1.A6 J1.B6 L9.4
GND: B1.1 B1.2 B1.7 B2.2 B3.2 B4.2 B5.2 B5.3 B5.4 B5.6 B5.7 B5.10 B6.2 B7.3 B8.3 B9.3 B10.7 C2.2 C6.2 C7.1 C8.2 C9.2 C10.2 C11.2 C15.2 C16.2 C19.2 C20.2 C21.2 C22.2 C23.2 C24.2 C25.2 C26.2 C27.2 D1.2 D1.4 D2.2 E1.2 J1.A1 J1.A12 J1.B1 J1.B12 J1.S1 J1.S2 J1.S3 J1.S4 J2.8 J2.16 J3.4 J4.4 J5.2 Q4.2 R11.1 R12.1 R13.1 R16.1 R17.1 R23.1 R24.1 SW1.1 SW2.2 U1.49 U2.4 U3.2 U3.25
  other v1: 43.543,21.803 44.643,21.803 45.743,21.803 46.843,21.803 47.943,21.803 43.543,22.903 44.643,22.903 45.743,22.903 46.843,22.903 47.943,22.903 43.543,24.003 44.643,24.003 45.743,24.003 46.843,24.003 47.943,24.003 43.543,25.103 44.643,25.103 45.743,25.103 46.843,25.103 47.943,25.103 43.543,26.203 44.643,26.203 45.743,26.203 46.843,26.203 47.943,26.203 4.53,35.391 5.63,35.391 4.53,36.491 5.63,36.491
HT: B1.8 B4.4 B4.5 B8.1 C10.1 Q1.3 R1.2 X1.2
NetB1_3: B1.3 R5.1 U1.25
NetB1_4: B1.4 J2.14 J3.2 J4.2 R4.2 R30.2 U1.42
NetB1_5: B1.5 J2.13 J3.1 J4.1 R3.2 R31.2 U1.39
NetB1_9: B1.9 C1.2 R2.1
NetB1_10: B1.10 C1.1 R1.1
NetB2_1: B2.1 C6.1 R7.2 U1.10
NetB3_1: B3.1 U1.34
NetB3_3: B3.3 J2.6 R9.2 U1.36
NetB3_4: B3.4 U1.18
NetB3_5: B3.5 R8.1 U1.14
NetB4_1: B4.1 C12.1
NetB4_3: B4.3 R10.2 R11.2
NetB4_6: B4.6 C12.2 L3.1
NetB5_5: B5.5 C11.1 C13.1 L2.2
NetB5_9: B5.9 L2.1
NetB6_1: B6.1 C17.1
NetB6_3: B6.3 R15.2 R16.2
NetB6_4: B6.4 R14.2
NetB6_6: B6.6 C17.2 L4.1
NetB7_4: B7.4 B8.2
NetB8_4: B8.4 DARR4.2
NetB9_4: B9.4 DARR5.2
NetC4_1: C4.1 C5.1
NetC4_2: C4.2 C7.2 U1.2
NetC5_2: C5.2 E1.3
NetC14_1: C14.1 C15.1 L3.2 R10.1
NetC18_1: C18.1 C20.1 L4.2 R15.1
NetC21_1: C21.1 R18.1
NetC24_1: C24.1 U1.26 U2.8
NetC27_1: C27.1 U3.16
NetD1_1: D1.1 R21.2
NetD1_3: D1.3 R22.2
NetDARR4_1: DARR4.1 Q1.1
NetDARR5_1: DARR5.1 Q2.1
NetDARR6_1: DARR6.1 Q3.1
NetJ1_A5: J1.A5 R23.2
NetJ1_B5: J1.B5 R24.2
NetJ2_1: J2.1 U1.15
NetJ2_2: J2.2 Q6.3 SW1.2 U1.9
NetJ2_3: J2.3 R29.1 U1.35
NetJ2_4: J2.4 U1.12
NetJ2_5: J2.5 R9.1 U1.38
NetJ2_9: J2.9 U1.21
NetJ2_10: J2.10 U1.17
NetJ2_11: J2.11 R26.1 U1.40
NetJ2_12: J2.12 R27.1 U1.41
NetJ5_1: J5.1 R2.2 X1.1
NetLS1_N: LS1.N Q4.3 R19.1
NetQ4_1: Q4.1 R20.2
NetQ5_1: Q5.1 R25.1
NetQ5_2: Q5.2 R28.2 U3.23 | length 0
  Top Layer w0.254: R28.2 R28.2@27.213,6.512
NetQ5_3: Q5.3 SW2.1 U1.23
NetQ6_1: Q6.1 R28.1 | length 0
  Top Layer w0.254: R28.1@27.174,5.65 R28.1
NetQ6_2: Q6.2 R25.2 U3.19
NetR20_1: R20.1 U1.20
NetR21_1: R21.1 U1.22
NetR22_1: R22.1 U1.24
NetR26_2: R26.2 U3.21
NetR27_2: R27.2 U3.20
NetU1_27: U1.27 U2.2
NetU1_29: U1.29 U2.1
NetU1_30: U1.30 U2.7
NetU1_31: U1.31 U2.6
NetU1_32: U1.32 U2.3
NetU1_33: U1.33 U2.5
NOT_3V3_BT: B7.2 B10.4
NOT_3V3_USB: B7.1 B9.1 B10.6
USB: B6.5 C16.1 C25.1 C26.1 D2.5 J1.A4 J1.A9 J1.B4 J1.B9 J2.15 Q3.3 R14.1 U3.7 U3.8
USB_D_N: L9.2 U3.4
USB_D_P: L1.1 L9.1 U3.3
VDDA: R32.2 U1.43
pads on no net: B10.1 B10.2 B10.8 B10.9 B10.10 B10.11 B10.12 B10.13 B10.14 D2.1 E1.1 E1.4 J1.A8 J1.B8 J3.MP1 J3.MP2 J4.MP1 J4.MP2 L1.2 U1.5 U1.6 U1.7 U1.8 U1.11 U1.13 U1.16 U1.28 U1.44 U1.45 U1.47 U1.48 U3.1 U3.9 U3.10 U3.11 U3.12 U3.13 U3.14 U3.15 U3.17 U3.18 U3.22 U3.24

## Text inside footprints (layer, text, board x,y; h text height)
J1: Mechanical 13 "PCB EDGE" at 1.294,49.792 h0.81 r180
LS1: Top Overlay "+" at 63.461,20.808 h1.27 r270; Top Overlay "-" at 63.461,5.608 h1.27 r270; Mechanical 13 "+" at 63.461,20.808 h1.27 r270; Mechanical 13 "-" at 63.461,5.608 h1.27 r270
Q1: Mechanical 9 "SOT-723" at 51.824,42.549 h0.5
Q2: Mechanical 9 "SOT-723" at 54.248,34.324 h0.5 r270
Q3: Mechanical 9 "SOT-723" at 21.598,34.04 h0.5
Q4: Mechanical 9 "SOT-23" at 54.891,6.115 h0.5 r270
Q5: Mechanical 9 "SOT-23" at 17.869,6.905 h0.5 r90
Q6: Mechanical 9 "SOT-23" at 17.615,1.698 h0.5 r90